# Altium PCB WirelessChargerTx.PcbDoc
Units mil, origin at the board's own origin, x right, y up, seen from the top; angles counter-clockwise.
Board outline 4250 x 3550 mil, 2 copper layers (Top Layer, Bottom Layer); 38 components, 30 nets, 144 pads, 16 vias.
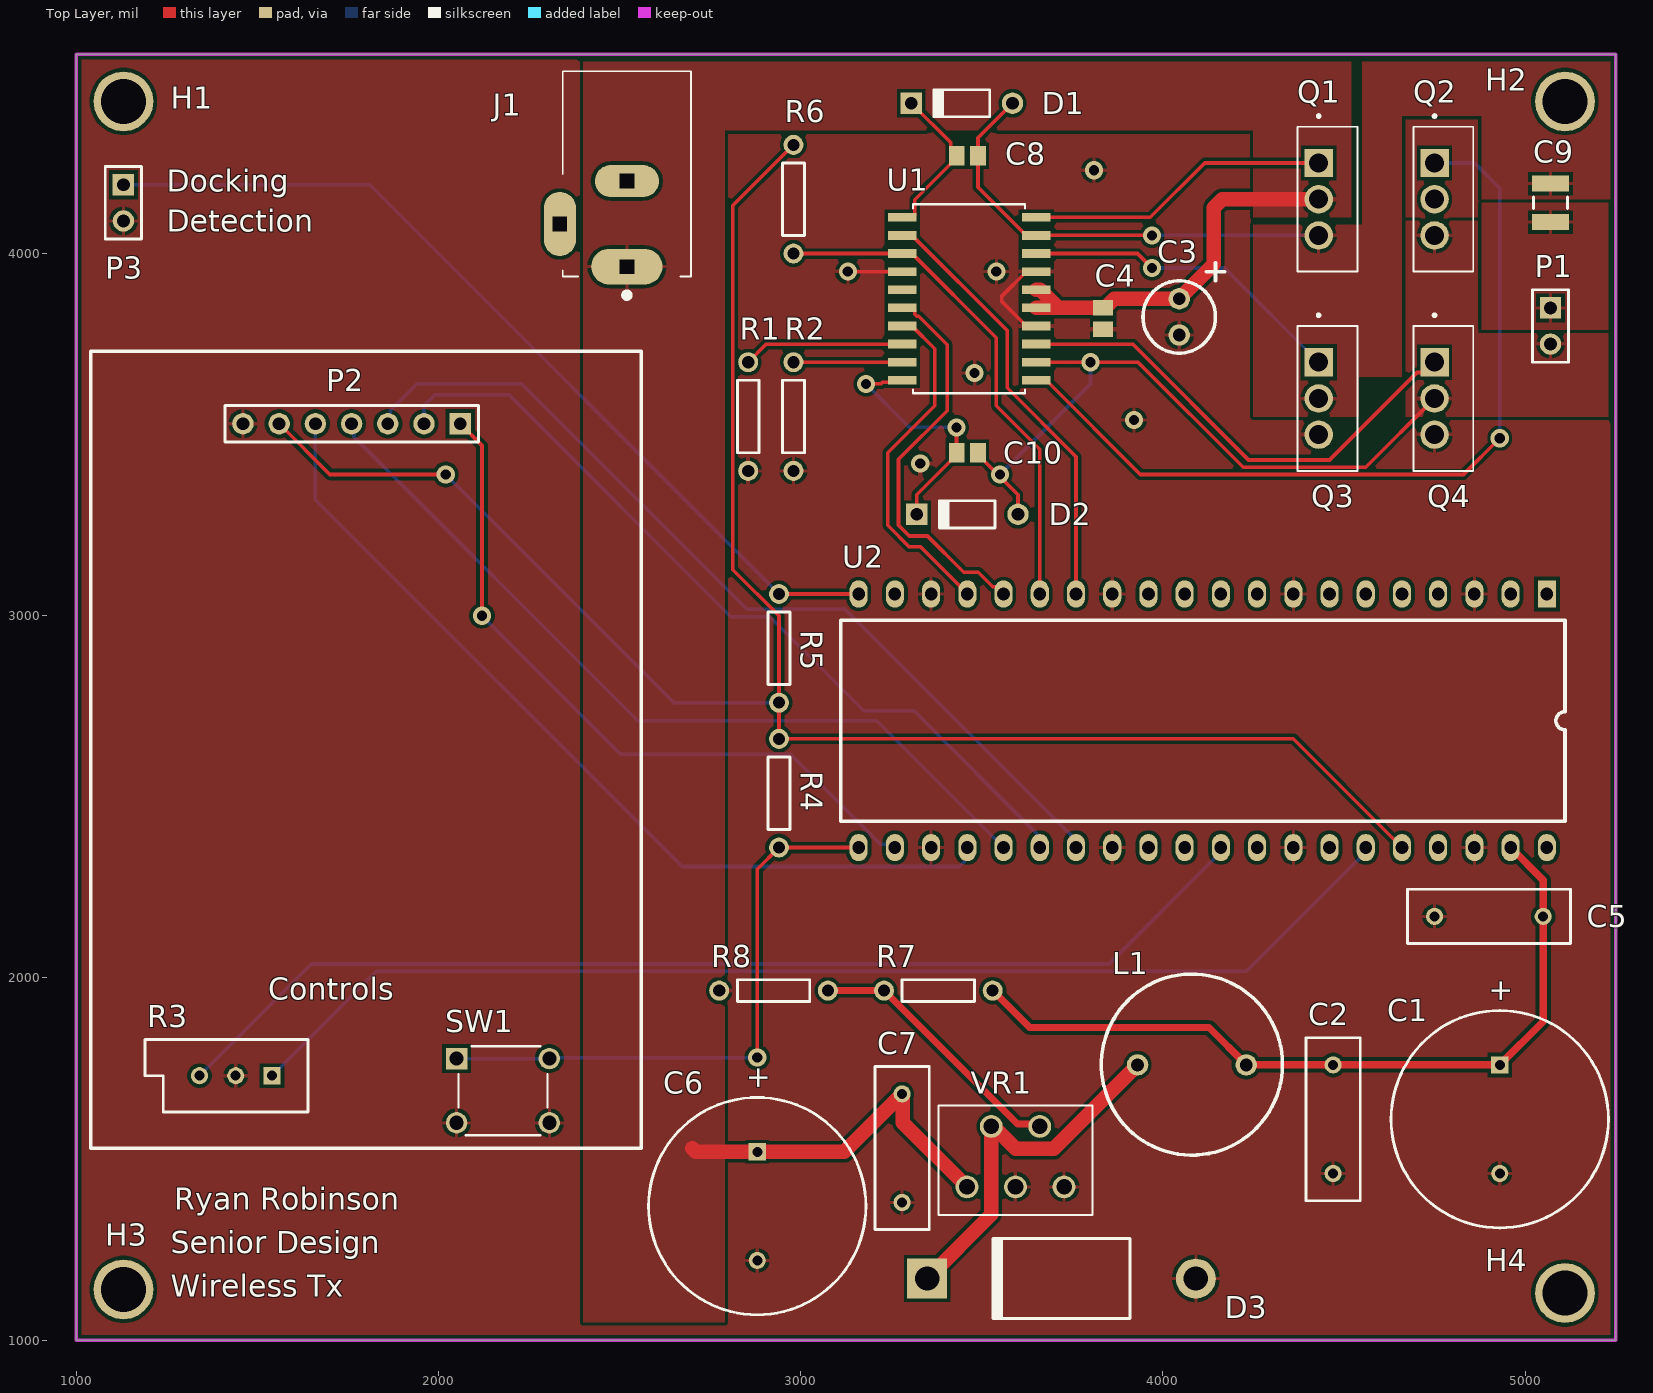
[diagram p0: Top Layer view]
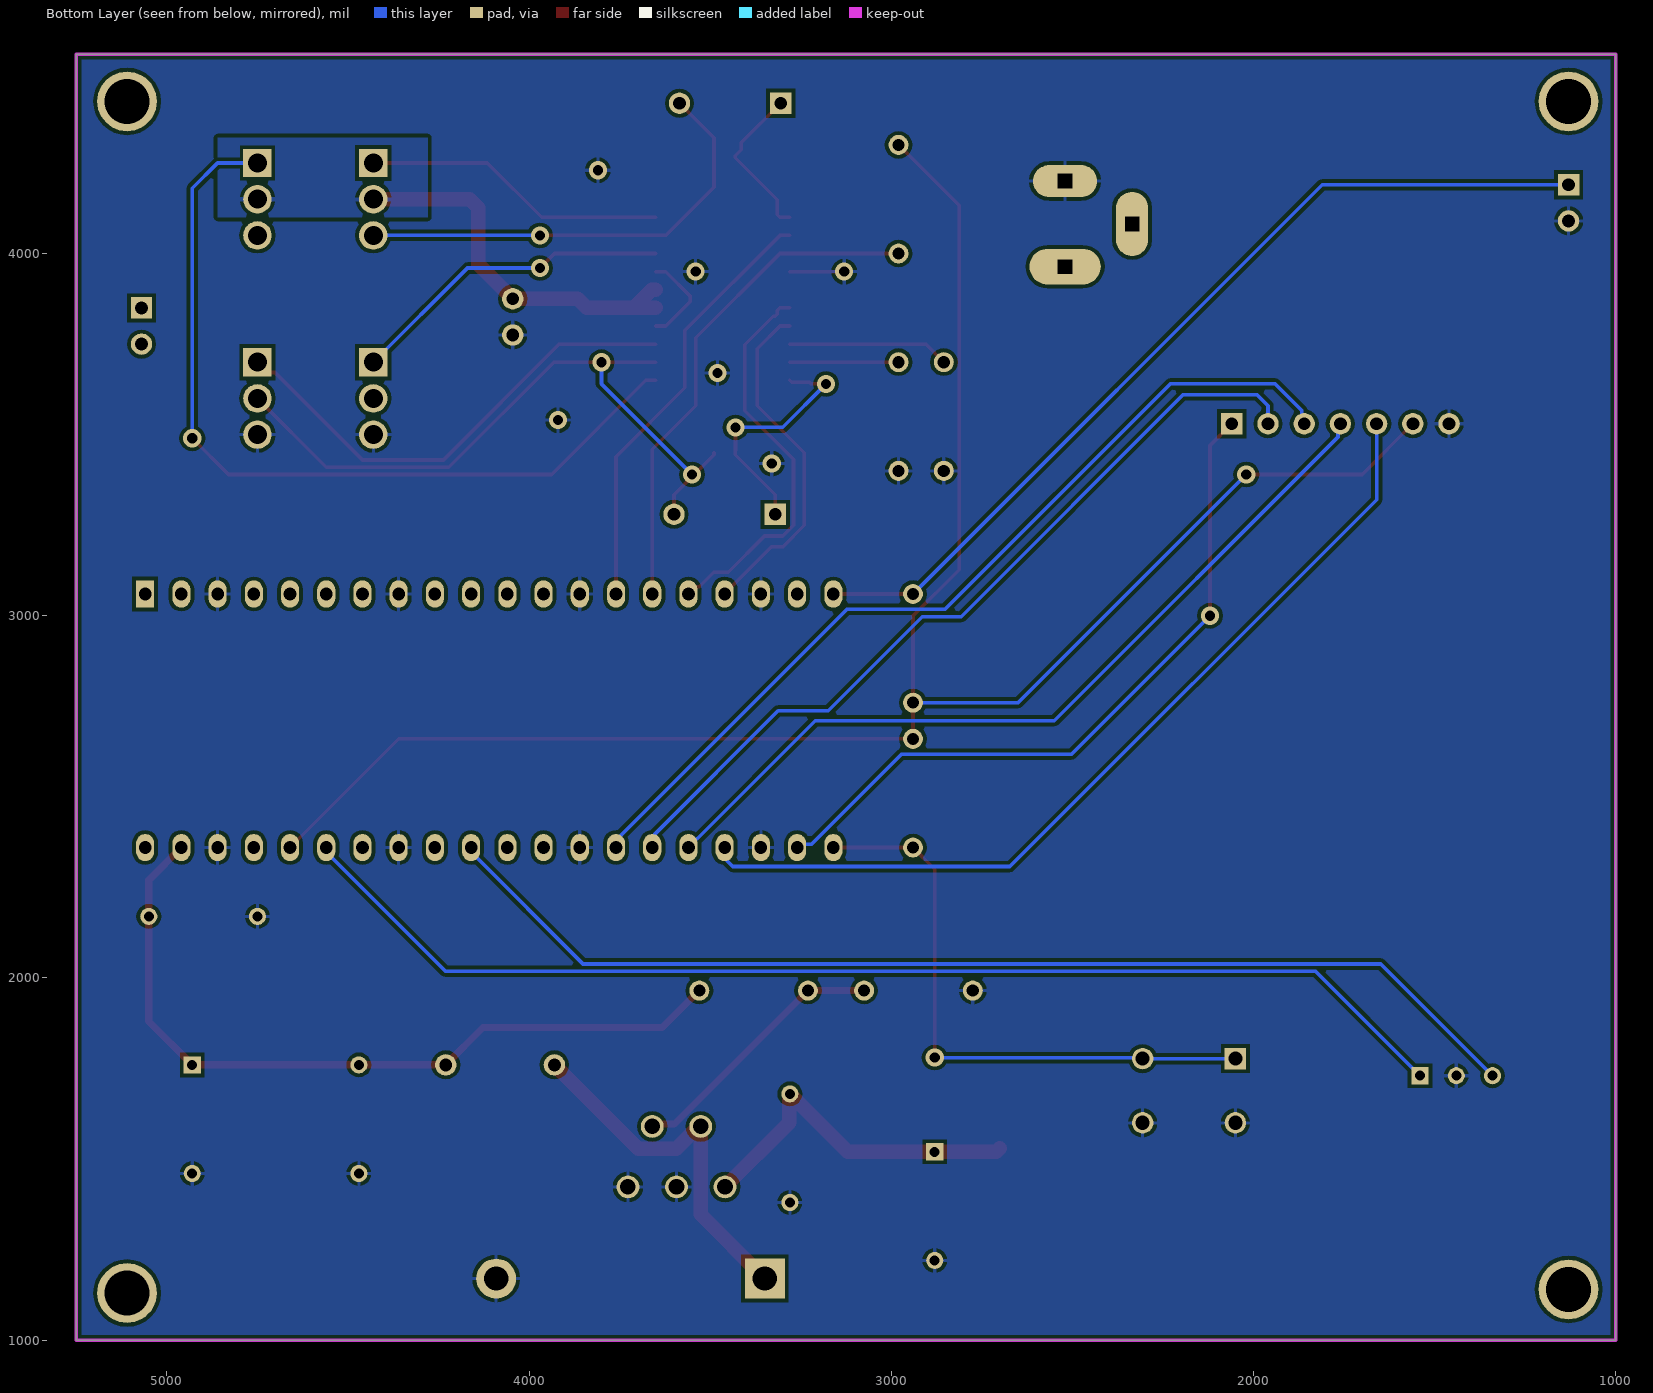
[diagram p1: Bottom Layer view, seen from below]

## Layer stack, top to bottom
Top Solder: solder mask 0.4, Solder Resist, Dk 3.5
Top Layer: signal copper 1.4
Dielectric 1: dielectric 12.6, FR-4, Dk 4.8
Bottom Layer: signal copper 1.4
Bottom Solder: solder mask 0.4, Solder Resist, Dk 3.5

## Board outline
1000,1000 1000,4550 5250,4550 5250,1000

## Design rules (kind name [scope] priority, off if disabled: settings)
Clearance [All] p1: gap=10 ignorepadtopadclearanceinfootprint=FALSE
MinimumSolderMaskSliver [All] p1: minsoldermaskwidth=4
PolygonConnect [All] p1: connectstyle=Relief reliefconductorwidth=10 reliefentries=4 polygonreliefangle="90 Angle" airgapwidth=10
RoutingVias [All] p1: holewidth=28 width=50 viastyle="Through Hole" minholewidth=28 minwidth=50 maxholewidth=28 maxwidth=50
SolderMaskExpansion [All] p1: expansion=4 istentingtop=FALSE
SupplyNets "Schematic Supply Nets_3" [InNet('GND')] p1: voltage=0.000
SupplyNets "Schematic Supply Nets_2" [InNet('+3V3')] p2: voltage=0.000
SupplyNets "Schematic Supply Nets" [InNet('Vin')] p3: voltage=0.000
Width [All] p1: maxlimit=40 minlimit=10 preferedwidth=10
29 further rules are at their usual default settings.

## Components (designator, comment, footprint, x,y, rotation, side; value= is the part's Value field where it differs from the comment)
C1 "Cap Pol1" RB7.6-15 4930,1610 r90 top value=1000uF
C2 "Cap" RAD-0.3 4470,1610 r90 top value=0.1uF
C3 "Cap Pol1" CAP_10uF 4045,3825 r270 top value=10uF
C4 "Cap" c0805 3835,3820.47 r90 top value=0.1uF
C5 "Cap" RAD-0.3 4900,2170 r180 top value=100pF
C6 "Cap Pol1" RB7.6-15 2880,1370 r90 top value=1000uF
C7 "Cap" RAD-0.3 3280,1530 r270 top value=100pF
C8 "Cap" C0805 3460,4270 r0 top value=0.1uF
C9 "Cap" C1210 5070,4140 r270 top value=94nF
C10 "Cap" C0805 3460,3450 r0 top value=0.1uF
D1 "Diode 1N4148" DO-35 3445,4415 r180 top
D2 "Diode 1N4148" DO-35 3460,3280 r180 top
D3 "Diode 1N5400" DO-201AD 3720,1170 r180 top
H1 "Hole 125mil" "Hole 125mil" 1130,4420 r0 top
H2 "Hole 125mil" "Hole 125mil" 5110,4420 r0 top
H3 "Hole 125mil" "Hole 125mil" 1130,1140 r0 top
H4 "Hole 125mil" "Hole 125mil" 5110,1130 r0 top
J1 "PJ-002BH" CUI_PJ-002BH 2520,3963.78 r90 top
L1 "Inductor" Inductor100uH 4080,1760 r0 top value=100uH
P1 "Header 2" HDR1X2 5070,3850 r270 top
P2 "Header 7" HDR1X7 2060,3530 r180 top
P3 "Header 2" HDR1X2 1130,4190 r270 top
Q1 "IRFZ44N" TO254P1016X419X2286-3 4430,4150 r270 top
Q2 "IRFZ44N" TO254P1016X419X2286-3 4750,4150 r270 top
Q3 "IRFZ44N" TO254P1016X419X2286-3 4430,3600 r270 top
Q4 "IRFZ44N" TO254P1016X419X2286-3 4750,3600 r270 top
R1 "Res1" AXIAL-0.3 2855,3550 r90 top value=10K
R2 "Res1" AXIAL-0.3 2980,3550 r90 top value=10K
R3 "RPot" VR5 1440,1730 r180 top value=1K
R4 "Res1" AXIAL-0.3 2940,2510 r90 top value=10k
R5 "Res1" AXIAL-0.3 2940,2910 r270 top value=10k
R6 "Res1" AXIAL-0.3 2980,4150 r90 top value=10k
R7 "Res1" AXIAL-0.3 3380,1965 r0 top value=3k
R8 "Res1" AXIAL-0.3 2925,1965 r0 top value=1k
SW1 "1825910-6" SW4_1825910-B_TEC 2305.91,1600 r0 top
U1 "HIP4080AIBZTCT" SOIC20_7P60X13_INR 3465.04,3875 r0 top
U2 "Raspberry Pi Pico" "Raspberry Pi Pico" 5060,3060 r270 top
VR1 "LM2576T-5.0/NOPB" T05A_TEX 3459,1423 r0 top

## Footprints (in the part's own frame and the unit in brackets; to place one, negate y for a bottom-side part, rotate by r counter-clockwise, add the part's x,y. Pads: shape width x height; smd on the part's side, far side on the other; paste and mask are expansions set on the pad)
AXIAL-0.3 [mm] "Axial Device, Thru-Hole; 2 Leads; 0.3 in Pin Spacing"
  round 1.4 hole 0.85: 1(-3.81,0) 2(3.81,0)
  silkscreen extent -2.54,-0.76 2.54,0.76
c0805 [mm] "Chip Capacitor, Body 2.0x1.3mm, IPC High Density"
  rect 1.1x1.4 smd: 1(-0.75,0) 2(0.75,0)
  body extent -1.1,-0.72 1.1,0.72, height 1.4
C0805 [mm] "Chip Capacitor, Body 2.0x1.3mm, IPC High Density"
  rect 1.1x1.4 smd: 1(-0.75,0) 2(0.75,0)
  body extent -1.1,-0.72 1.1,0.72, height 1.4
C1210 [mm] "Chip Capacitor, Body 3.2x2.5mm, IPC High Density"
  rect 1.1x2.6 smd: 1(-1.35,0) 2(1.35,0)
  silkscreen extent -0.4,-1.2 0.4,1.2, body extent -1.7,-1.35 1.7,1.35, height 1.3
CAP_10uF [mm] "10uF Electrolytic Capacitor"
  round 1.5 hole 0.9: 1(-1.27,0) 2(1.27,0)
  silkscreen extent -3.81,-2.54 2.54,3.17
CUI_PJ-002BH [mm]
  oval 2.5x5 hole 1 square: 1(0,0)
  oval 2.25x4.5 hole 1 square: 2(6,0)
  oval 4.5x2.25 hole 1 square: 3(3,4.7)
  silkscreen extent -2.2,-4.5 13.7,4.5, body extent -0.64,-4.7 13.76,4.7, height 4.5
DO-35 [mm] "Diode, Axial; Body 3.8 x 1.9 mm (LxDia. max), Lead Dia. 0.53 mm (max)"
  round 1.5 hole 0.9: 1(-3.55,0)
  rect 1.5x1.5 hole 0.9: 2(3.55,0)
  silkscreen extent -1.95,-0.95 2.05,0.95
DO-201AD [mm] "Diode, Axial; Body 9.5 x 5.6 mm (LxDia. max), Lead Dia. 1.32 mm (max)"
  round 2.8 hole 1.7: 1(-9.42,0)
  rect 2.8x2.8 hole 1.7: 2(9.42,0)
  silkscreen extent -4.8,-2.8 4.9,2.8
HDR1X2 [mm] "Connector; Header; 2 Position"
  rect 1.5x1.5 hole 0.9: 1(0,0)
  round 1.5 hole 0.9: 2(2.54,0)
  silkscreen extent -1.27,-1.27 3.81,1.27
HDR1X7 [mm] "Connector; Header; 7 Position"
  rect 1.5x1.5 hole 0.9: 1(0,0)
  round 1.5 hole 0.9: 2(2.54,0) 3(5.08,0) 4(7.62,0) 5(10.16,0) 6(12.7,0) 7(15.24,0)
  silkscreen extent -1.27,-1.27 16.51,1.27
"Hole 125mil" [mil]
  round 165 hole 125: 1(0,0)
Inductor100uH [mm]
  round 1.5 hole 0.9: 1(-3.81,0) 2(3.81,0)
  silkscreen extent -6.35,-6.33 6.35,6.37
RAD-0.3 [mm] "Radial Cap, Thru-Hole; 2 Leads; 0.3 in Pin Spacing"
  round 1.2 hole 0.7: 1(-3.81,0) 2(3.81,0)
  silkscreen extent -5.71,-1.91 5.71,1.91
"Raspberry Pi Pico" [mil]
  rect 75x50 hole 35: 1(0,0)
  oval 75x50 hole 35: 2(0,-100) 3(0,-200) 4(0,-300) 5(0,-400) 6(0,-500) 7(0,-600) 8(0,-700) 9(0,-800) 10(0,-900) 11(0,-1000) 12(0,-1100) 13(0,-1200) 14(0,-1300) 15(0,-1400) 16(0,-1500) 17(0,-1600) 18(0,-1700) 19(0,-1800) 20(0,-1900) 21(700,-1900) 22(700,-1800) 23(700,-1700) 24(700,-1600) 25(700,-1500) 26(700,-1400) 27(700,-1300) 28(700,-1200) 29(700,-1100) 30(700,-1000) 31(700,-900) 32(700,-800) 33(700,-700) 34(700,-600) 35(700,-500) 36(700,-400) 37(700,-300) 38(700,-200) 39(700,-100) 40(700,0)
  silkscreen extent 72,-1950 628,50
RB7.6-15 [mm] "Polarized Capacitor (Radial); 2 Leads"
  rect 1.2x1.2 hole 0.7: 1(3.81,0)
  round 1.2 hole 0.7: 2(-3.81,0)
  silkscreen extent -7.62,-7.62 7.62,7.62
SOIC20_7P60X13_INR [mil]
  rect 79x24 smd paste+0 mask+0: 1(-185.04,225) 2(-185.04,175) 3(-185.04,125) 4(-185.04,75) 5(-185.04,25) 6(-185.04,-25) 7(-185.04,-75) 8(-185.04,-125) 9(-185.04,-175) 10(-185.04,-225) 11(185.04,-225) 12(185.04,-175) 13(185.04,-125) 14(185.04,-75) 15(185.04,-25) 16(185.04,25) 17(185.04,75) 18(185.04,125) 19(185.04,175) 20(185.04,225)
  silkscreen extent -155,-261 155,261, body extent -211,-256 211,256, height 104
SW4_1825910-B_TEC [mil]
  rect 59x59 hole 39 paste-99999 mask+0: 1(-255.91,177.17)
  round 59 hole 39 paste-99999 mask-29.5: 2(0,177.17) 3(-255.91,0) 4(0,0)
  silkscreen extent -251,-34 -5,212
T05A_TEX [mil]
  round 63 hole 43 paste-99999: 1(0,0) 2(67,167) 3(134,0) 4(201,167) 5(268,0)
  silkscreen extent -78,-78 346,225, body extent -74,-73 341,113, height 610
TO254P1016X419X2286-3 [mm]
  rect 1.995x1.995 / inner round 1.995 / far side rect 1.995x1.995 hole 1.33: 1(-2.54,0)
  round 1.995 hole 1.33: 2(0,0) 3(2.54,0)
  silkscreen extent -5.93,-1.48 5.08,2.72, body extent -5.08,-1.47 5.08,2.72, height 22.86
VR5 [mm] "Thru-Hole; 3 Leads"
  rect 1.2x1.2 hole 0.7: 1(-2.54,0)
  round 1.2 hole 0.7: 2(0,0) 3(2.54,0)
  silkscreen extent -5.08,-2.54 6.35,2.54

## Part data
C1 C3 C6: "Polarized Capacitor (Radial)", LatestRevisionDate=17-Jul-2002, LatestRevisionNote="Re-released for DXP Platform.", PackageDescription="Polarized Capacitor (Radial); 2 Leads", PackageReference=RB7.6-15, Published=8-Jun-2000, Publisher="Altium Limited"
C2 C4 C5 C7 C8 C9 C10: "Capacitor", LatestRevisionDate=17-Jul-2002, LatestRevisionNote="Re-released for DXP Platform.", PackageDescription="Radial Cap, Thru-Hole; 2 Leads; 0.3 in Pin Spacing", PackageReference=RAD-0.3, Published=8-Jun-2000, Publisher="Altium Limited"
D1 D2: "High Conductance Fast Diode", Code_JEDEC=DO-204-AH, ComponentLink1Description="Manufacturer Link", ComponentLink1URL=http://www.fairchildsemi.com/, ComponentLink2Description=Datasheet, ComponentLink2URL=http://www.fairchildsemi.com/ds/1N%2F1N4148.pdf, DatasheetVersion=1997, LatestRevisionDate=17-Jul-2002, LatestRevisionNote="Re-released for DXP Platform.", PackageDescription="Diode, Axial; Body 3.8 x 1.9 mm (LxDia. max), Lead Dia. 0.53 mm (max)", PackageReference=DO-35, Published=8-Jun-2000, Publisher="Altium Limited"
D3: "3 Amp General Purpose Rectifier", ComponentLink1Description="Manufacturer Link", ComponentLink1URL=http://www.fairchildsemi.com/, ComponentLink2Description=Datasheet, ComponentLink2URL=http://www.fairchildsemi.com/ds/1N%2F1N5400.pdf, DatasheetVersion=1998, LatestRevisionDate=17-Jul-2002, LatestRevisionNote="Re-released for DXP Platform.", PackageDescription="Diode, Axial; Body 9.5 x 5.6 mm (LxDia. max), Lead Dia. 1.32 mm (max)", PackageReference=DO-201AD, PackageVersion=Aug-1999, Published=8-Jun-2000, Publisher="Altium Limited"
J1: "2.5 x 6.5 mm, 5.0 A, Horizontal, Through Hole, Dc Power Jack Connector", Package=None, Check_prices=https://www.snapeda.com/parts/PJ-002BH/Same+Sky/view-part/?ref=eda, MF="Same Sky", MP=PJ-002BH, SnapEDA_Link=https://www.snapeda.com/parts/PJ-002BH/Same+Sky/view-part/?ref=snap
P1 P3: "Header, 2-Pin", LatestRevisionDate=17-Jul-2002, LatestRevisionNote="Re-released for DXP Platform.", Publisher="Altium Limited"
P2: "Header, 7-Pin", LatestRevisionDate=17-Jul-2002, LatestRevisionNote="Re-released for DXP Platform.", Publisher="Altium Limited"
Q1 Q2 Q3 Q4: "N-Channel 55 V 49A (Tc) 94W (Tc) Through Hole TO-220AB", Package="TO-220-3 Infineon", Availability="In Stock", Check_prices=https://www.snapeda.com/parts/IRFZ44N/Infineon+Technologies/view-part/?ref=eda, MF="Infineon Technologies", MP=IRFZ44N, Price=None, Purchase-URL=https://pricing.snapeda.com/search/part/IRFZ44N/?ref=eda, SnapEDA_Link=https://www.snapeda.com/parts/IRFZ44N/Infineon+Technologies/view-part/?ref=snap
R1 R2 R4 R5 R6 R7 R8: "Resistor", LatestRevisionDate=17-Jul-2002, LatestRevisionNote="Re-released for DXP Platform.", PackageDescription="Axial Device, Thru-Hole; 2 Leads; 0.3 in Pin Spacing", PackageReference=AXIAL-0.3, Published=8-Jun-2000, Publisher="Altium Limited"
R3: "Potentiometer", LatestRevisionDate=17-Jul-2002, LatestRevisionNote="Re-released for DXP Platform.", PackageDescription="Variable Resistor, Thru-Hole; 3 Leads", PackageReference=VR5, Published=8-Jun-2000, Publisher="Altium Limited", Set Position=0.5, Sim Note="Enter the Resistance value and the set point into parameter fields."
SW1: "FSM4JH=6MM TACT SWITCH, HIGH TEMP", Manufacturer_Name="TE Connectivity", Copyright="Copyright (C) 2026 Ultra Librarian. All rights reserved.", Manufacturer_Part_Number=1825910-6, RefDes=RefDes, Type=Type
U1: "H Bridge Driver", Manufacturer_Name="Renesas / Intersil", Copyright="Copyright (C) 2026 Ultra Librarian. All rights reserved.", Manufacturer_Part_Number=HIP4080AIBZTCT, RefDes=RefDes, Type=Type
VR1: "SIMPLE SWITCHERÂ® 40V, 3A Low Component Count Step-Down Regulator", Package="TO-220-5 Texas Instruments", Check_prices=https://www.snapeda.com/parts/LM2576T-5.0/NOPB/Texas+Instruments/view-part/?ref=eda, MF="Texas Instruments", MP=LM2576T-5.0/NOPB, SnapEDA_Link=https://www.snapeda.com/parts/LM2576T-5.0/NOPB/Texas+Instruments/view-part/?ref=snap
L1: Code_IEC=1005, Code_JEITA=0402, LatestRevisionDate=29-May-2009, LatestRevisionNote="IPC-7351 Footprint Added.", PackageDescription="Chip Inductor", PackageReference=0402-A, Published=8-Jun-2000, Publisher="Altium Limited"

## Via types
v1: diameter 50, hole 28, Top Layer to Bottom Layer, 16 vias

## Nets (pads, with @x,y where several pads share a name; then routed paths per layer and width w, separated by ;. In a path a pad name is that pad's centre, name@x,y a point inside that pad or via, vN(x,y) a via of type N, cw(c..) or ccw(c..) an arc to the next point about the centre after c; other vN are vias at no path point)
+3V3: P2.6 R4.2 R5.2 R6.2 U2.36 | length 5306.4
  Top Layer w10: P2.6 1700,3390 v1(2020,3390) ; R6.2 2812.44,4132.44 2812.44,3127.37 2940,2999.81 R5.2 R4.2 4360,2660 4639.85,2380.15 4641.52,2380.15 4660,2361.68 U2.36
  Bottom Layer w10: v1(2020,3390) 2650,2760 R5.2
AHO: Q2.1 U1.11 | length 2328
  Top Layer w10: U1.11 3677.58,3650 3937.58,3390 4830,3390 v1(4930,3490)
  Bottom Layer w10: Q2.1 4860,4250 4930,4180 v1(4930,3490)
AHS: C10.2 D2.1 P1.2 Q2.3 Q4.2 U1.12 | length 1928
  Top Layer w10: C10.2 3489.53,3444.09 3599.76,3333.86 D2.1 ; U1.12 v1(3800,3700) 3931.43,3700 4221.43,3410 4560,3410 Q4.2
  Bottom Layer w10: v1(3550,3390) 3800,3640 v1(3800,3700)
ALO: Q4.1 U1.13 | length 1344.3
  Top Layer w10: U1.13 3916.39,3750 4236.39,3430 4460,3430 4701.59,3671.59 4721.59,3671.59 Q4.1
BHO: Q1.1 U1.20 | length 842.1
  Top Layer w10: U1.20 3965.15,4100 4115.15,4250 Q1.1
BHS: C8.2 C9.1 D1.1 Q1.3 Q3.2 U1.19 | length 1267
  Top Layer w10: D1.1 3489.53,4319.76 C8.2 3489.53,4183.05 3622.58,4050 U1.19 v1(3970,4050)
  Bottom Layer w10: v1(3970,4050) Q1.3
BLO: Q3.1 U1.18 | length 904.2
  Top Layer w10: U1.18 3930,4000 v1(3970,3960)
  Bottom Layer w10: v1(3970,3960) 4170,3960 Q3.1
CLK: P2.5 U2.24 | length 2468.7
  Bottom Layer w10: P2.5 1660,3320 2672.5,2307.5 3437.5,2307.5 3452.35,2322.35 3452.35,2352.35 U2.24
CS: P2.1 U2.22 | length 1959.9
  Top Layer w10: P2.1 2120,3470 v1(2120,3000)
  Bottom Layer w10: v1(2120,3000) 2502.56,2617.44 2971.63,2617.44 3220,2369.07 3250.93,2369.07 U2.22
DC: P2.2 U2.26 | length 2297.8
  Bottom Layer w10: P2.2 1960,3580 1990,3610 2194.53,3610 2807.09,2997.44 2914.09,2997.44 3174.09,2737.44 3312.56,2737.44 3652.35,2397.65 3652.35,2367.65 U2.26
DIS: R6.1 U1.3 U2.15 | length 1413.5
  Top Layer w10: R6.1 U1.3 3307.5,4000 3540,3767.5 3540,3580 3660,3460 U2.15
GND: C1.2 C2.1 C3.2 C4.1 C5.2 C6.2 C7.2 D3.1 J1.2 P2.7 P3.2 Q3.3 Q4.3 R1.1 R2.1 R3.2 R8.1 SW1.3 SW1.4 U1.4 U1.14 U1.17 U2.3 U2.8 U2.13 U2.18 U2.23 U2.28 U2.33 U2.38 VR1.3 VR1.5 | length 415.2
  Top Layer w10: v1(3130,3950) U1.4 ; U1.14 3622.58,3800 3555.43,3867.15 3555.43,3882.85 3622.58,3950 U1.17
  Top Layer w40: D3.1@4057.61,1173.25 D3.1@4060.87,1170
  other v1: 3330,3420 3920,3540 3480,3670 3540,3950 3810,4230
HEN: U1.2 U2.14 | length 1204.9
  Top Layer w10: U1.2 3307.5,4050 3570,3787.5 3570,3629.08 3760,3439.08 U2.14
IN+: U1.6 U2.16 | length 1095.9
  Top Layer w10: 3275.71,3244.26 3284.5,3235.47 ; 3275.71,3244.29 3270,3250 3270,3431.72 3404.14,3565.86 3404.14,3748.57 3325.71,3827 3320.36,3827 3314.5,3832.86 3314.5,3843 3307.5,3850 U1.6 ; 3284.53,3235.47 3300,3220 3350,3220 3450,3120 3490,3120 3529.85,3080.15 3541.52,3080.15 3560,3061.68 U2.16
IN-: U1.7 U2.17 | length 956.9
  Top Layer w10: U1.7 3307.5,3800 3370,3737.5 3370,3580 3240,3450 3240,3250 3300,3190 3331.68,3190 3460,3061.68 U2.17
LSW: P3.1 R5.1 U2.20 | length 2498.1
  Top Layer w10: R5.1 U2.20
  Bottom Layer w10: P3.1 1810,4190 R5.1
MOSI: P2.4 U2.25 | length 2303.2
  Bottom Layer w10: P2.4 1766.49,3523.51 1766.49,3493.51 2550,2710 3210,2710 3535.47,2384.53 3537.14,2384.53 3560,2361.68 U2.25
NetC8_1: C8.1 D1.2 U1.1 | length 445.3
  Top Layer w10: U1.1 3307.5,4100 3314.5,4107 3314.5,4148.12 3430.47,4264.09 C8.1 3413.82,4286.65 3413.82,4306.42 D1.2
NetC9_2: C9.2 P1.1
NetC10_1: C10.1 D2.2 U1.10 | length 689.7
  Top Layer w10: v1(3180,3640) 3220.49,3640 3225.5,3645.01 3275.01,3645.01 U1.10 ; D2.2 3320.24,3333.86 3430.47,3444.09 C10.1 3430.47,3455.91 3430,3456.38 v1(3430,3520)
  Bottom Layer w10: v1(3180,3640) 3300,3520 v1(3430,3520)
NetD3_2: D3.2 L1.1 VR1.2 | length 1018.6
  Top Layer w40: D3.2 3526,1346.87 VR1.2 3532.22,1590 3593.72,1528.5 3698.5,1528.5 L1.1
NetR1_2: R1.2 U1.8 | length 445.7
  Top Layer w10: R1.2 2905,3750 U1.8
NetR2_2: R2.2 U1.9 | length 300
  Top Layer w10: R2.2 U1.9
NetR3_1: R3.1 U2.35 | length 3288.3
  Bottom Layer w10: R3.1 1828.49,2018.49 4230.99,2018.49 4560,2347.5 U2.35
NetR3_3: R3.3 U2.31 | length 3088.3
  Bottom Layer w10: R3.3 1648.49,2038.49 3850.99,2038.49 4160,2347.5 U2.31
NetR7_1: R7.1 R8.2 VR1.4 | length 740.3
  Top Layer w20: R8.2 R7.1 3598.5,1596.5 3653.5,1596.5 VR1.4
PB: R4.1 SW1.1 SW1.2 U2.21 | length 1656
  Top Layer w10: v1(2880,1780) 2880,2300 R4.1 U2.21
  Bottom Layer w10: SW1.1 SW1.2 2308.74,1780 v1(2880,1780)
RES: P2.3 U2.27 | length 2505
  Bottom Layer w10: P2.3 1866.49,3536.49 1866.49,3566.49 1940,3640 2230,3640 2852.56,3017.44 3122.56,3017.44 3760,2380 U2.27
Vin: C3.1 C4.2 C6.1 C7.1 J1.1 Q1.2 Q2.2 U1.15 U1.16 VR1.1 | length 2053.8
  Top Layer w40: 2700,1530 2710,1520 C6.1 3120,1520 C7.1 3281.39,1678.61 3281.39,1600.61 VR1.1 ; U1.15 3711.58,3850 ; U1.16 3661.58,3900 3711.58,3850 ; C4.2 3711.58,3850 ; C4.2@3840.91,3850 3865.91,3875 C3.1 4140,3970 4140,4126.57 4163.43,4150 Q1.2
Wired5V: C1.1 C2.2 C5.1 L1.2 R7.2 U2.39 | length 2171.9
  Top Layer w20: R7.2 3632.12,1862.88 4127.12,1862.88 L1.2 C2.2 C1.1 5050,1880 C5.1 5050,2270 U2.39
pads on no net: H1.1 H2.1 H3.1 H4.1 J1.3 U1.5 U2.1 U2.2 U2.4 U2.5 U2.6 U2.7 U2.9 U2.10 U2.11 U2.12 U2.19 U2.29 U2.30 U2.32 U2.34 U2.37 U2.40

## Polygon pours and split planes (outlines as drawn)
GND on Bottom Layer "Bottom Layer-GND" (solid, pour order 7): 1000,1000 1000,4550 5250,4550 5250,1000
Vin on Bottom Layer "VIN_L02_P000" (solid, pour order 0): 4280,4320 4280,4100 4860,4100 4860,4320
GND on Top Layer "GND_L01_P011" (solid, pour order 11): 1000,1000 1000,4550 5250,4550 5250,1000
AHS on Top Layer "AHS_L01_P009" (solid, pour order 9): 5230,3780 5230,3550 4670,3550 4670,3780
AHS on Top Layer "AHS_L01_P010" (solid, pour order 10): 4670,4090 4870,4090 4870,3750 4670,3750
NetC9_2 on Top Layer "NETC9_2_L01_P008" (solid, pour order 8): 4880,4140 4880,3790 5230,3790 5230,4140
BHS on Top Layer "BHS_L01_P005" (solid, pour order 5): 4250,4080 4250,3550 4660,3550 4660,4530 4550,4530 4550,4090 4550,4080
BHS on Top Layer "BHS_L01_P006" (solid, pour order 6): 4550,4530 5240,4530 5240,4150 4880,4150 4880,4380 4550,4380
Vin on Top Layer "VIN_L01_P004" (solid, pour order 4): 4520,4360 4520,4100 4250,4100 4250,4360
Vin on Top Layer "VIN_L01_P003" (solid, pour order 3): 2720,4530 2720,4340 4520,4340 4520,4530
Vin on Top Layer "VIN_L01_P001" (solid, pour order 1): 2400,4530 2400,1050 2790,1050 2790,4530

## Keep-outs
Keep-Out Layer:
  the board outline again, w10

## Other copper
Top Layer:
  pour cut-out: 4678.37,3550 4548.37,3420 4471.63,3420 4601.63,3550
  pour cut-out: 4660,3660 4540,3660 4540,3550 4660,3550

## Silkscreen, mask and mechanical layers (free items; w line width, h text height)
Top Overlay:
  lines w10: 1040,1530 2560,1530 2560,3730 1040,3730 1040,1530
  text "Docking" at 1250,4169.99 h60
  text "Detection" at 1250,4060 h60
  text "Controls" at 1530,1940 h60
  text "Ryan Robinson" at 1270,1359.99 h60
  text "Senior Design" at 1260,1239.99 h60
  text "Wireless Tx" at 1260,1120 h60

## Text inside footprints (layer, text, board x,y; h text height)
C1: Top Overlay "+" at 4959.01,1930.15 h59.06 r90
C6: Top Overlay "+" at 2909.01,1690.15 h59.06 r90
SW1: Mechanical 13 "*" at 2083.41,1755 h50